# Altium PCB Camera_Board.PcbDoc
Units mm, origin at the board's own origin, x right, y up, seen from the top; angles counter-clockwise.
Board outline 85 x 80 mm, 4 copper layers (Top Layer, GND, DC Power, Bottom Layer), stack 1.782 mm thick; 98 components, 60 nets, 288 pads, 0 vias.
Unrouted connection lines stored in the file: 203.
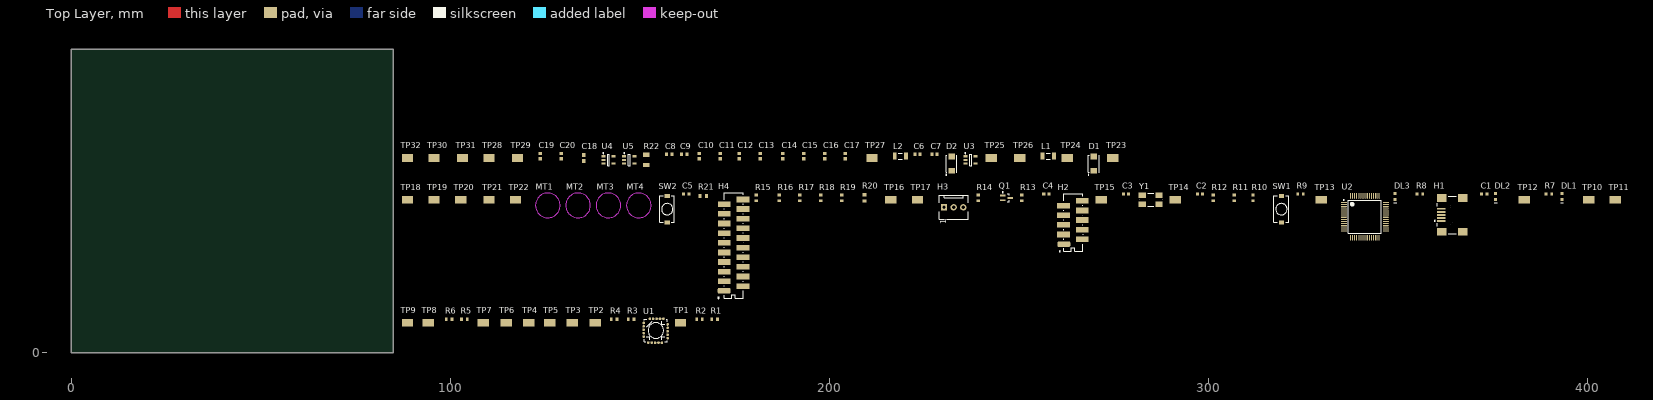
[diagram p0: Top Layer view]
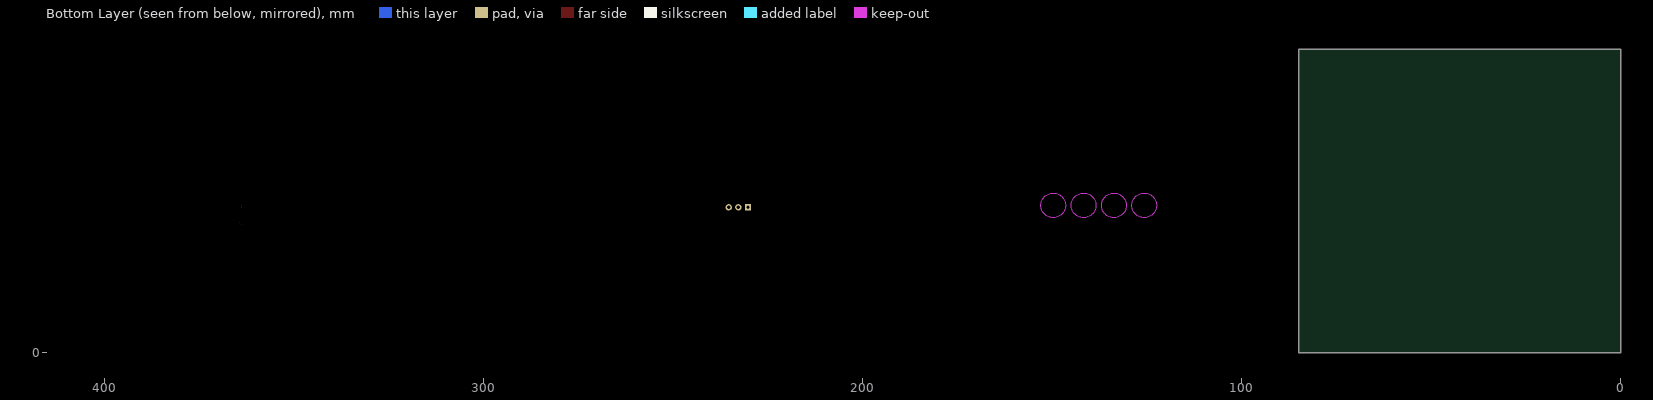
[diagram p1: Bottom Layer view, seen from below]
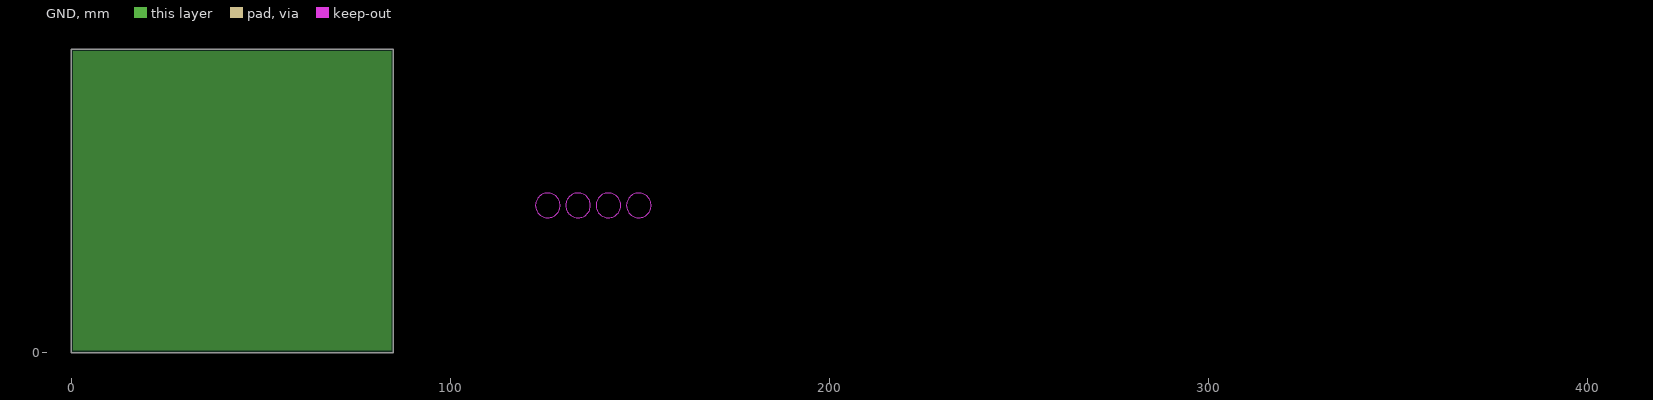
[diagram p2: GND, clearances drawn from the general rule]
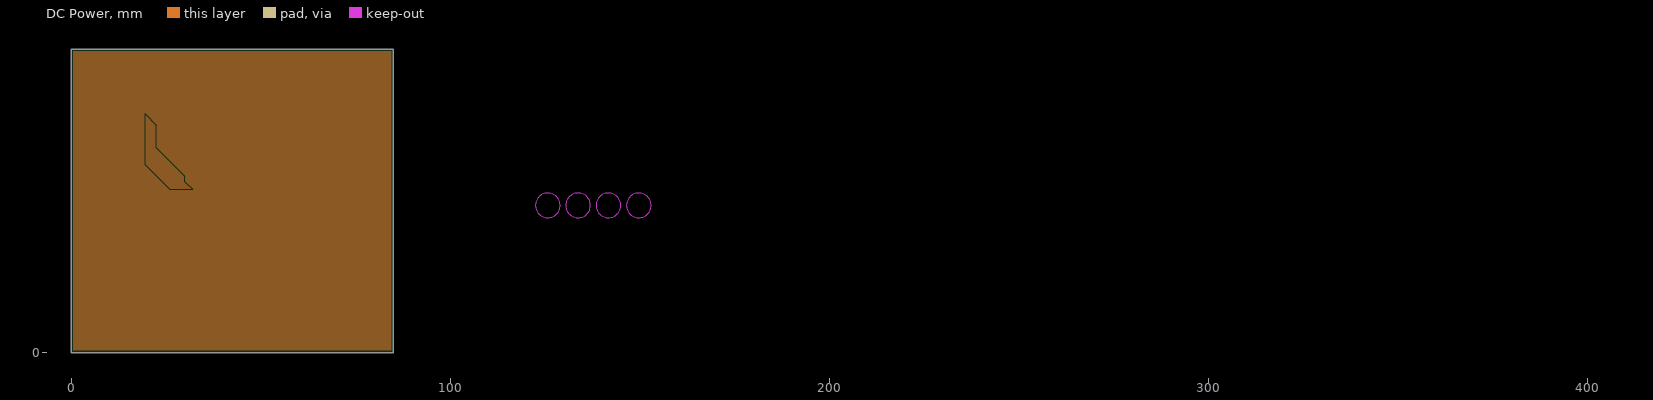
[diagram p3: DC Power, clearances drawn from the general rule]

## Layer stack, top to bottom
Top Solder: solder mask 0.0102, Solder Resist, Dk 3.5
Top Layer: signal copper 0.0356
Dielectric1: prepreg 0.32, FR-4, Dk 4.8
GND: plane copper 0.0356
Dielectric2: core 1, FR-4, Dk 4.8
DC Power: plane copper 0.0356
Dielectric3: prepreg 0.32, FR-4, Dk 4.8
Bottom Layer: signal copper 0.0356
Bottom Solder: solder mask 0.0102, Solder Resist, Dk 3.5

## Board outline
0,0 85,0 85,80 0,80

## Design rules (kind name [scope] priority, off if disabled: settings)
Clearance Min_Clearance_Circuit_Labs [All] p1: gap=0.15
DiffPairsRouting [All] p1: maxlimit=0.254 minlimit=0.254 mostfreqgap=0.254 toplayer_minwidth=0.381 toplayer_maxwidth=0.381 toplayer_prefwidth=0.381 bottomlayer_minwidth=0.381 bottomlayer_maxwidth=0.381 bottomlayer_prefwidth=0.381 maxuncoupledlength=12.7
FanoutControl Fanout_BGA [IsBGA] p1 off: bgadir=Out bgaviamode=Centered fanoutstyle=Auto fanoutdirection=Alternating viagrid=0.025 // Fanout_BGA (Default Rule)
HoleSize [All] p1: absolutevalues=TRUE maxlimit=10 minlimit=0.3 maxpercent=80.000 minpercent=20.000
MinimumAnnularRing [All] p1: minimumring=0.1
MinimumSolderMaskSliver [All] p1: minsoldermaskwidth=0.25
NetAntennae [All] p1: netantennaetolerance=1
PasteMaskExpansion [All] p1 off: expansion=0.2
PlaneClearance [All] p1: clearance=0.508
PlaneConnect [All] p1: planeconnectstyle=Relief reliefexpansion=0.508 reliefentries=4 reliefconductorwidth=0.254 reliefairgap=0.254
PolygonConnect [All] p1: connectstyle=Relief reliefconductorwidth=0.254 reliefentries=4 polygonreliefangle="90 Angle" airgapwidth=0.254
RoomDefinition Power_Distribution [InComponentClass('Power_Distribution')] p1: confinementstyle=ConfineIn formatcopy=TRUE lockcomponents=FALSE outline 86.2,46.3 279.199,46.3 279.199,55.8 86.2,55.8
RoomDefinition Camera_Board [InComponentClass('Camera_Board')] p2: confinementstyle=ConfineIn formatcopy=TRUE lockcomponents=FALSE outline 86.2,13.8 410.699,13.8 410.699,45.3 86.2,45.3
RoomDefinition Camera [InComponentClass('Camera')] p3: confinementstyle=ConfineIn formatcopy=TRUE lockcomponents=FALSE outline 86.2,1.8 171.2,1.8 171.2,12.3 86.2,12.3
RoutingVias [All] p1: holewidth=0.5 width=1 viastyle="Through Hole" minholewidth=0.3 minwidth=0.6 maxholewidth=1 maxwidth=2
SMDNeckDown [All] p1 off: percent=50.000
SMDToCorner [All] p1: distance=98425
SMDToPlane [All] p1: distance=1968504
SilkToSolderMaskClearance SilkscreenOverComponentPads [IsPad] p1: minsilkscreentomaskgap=0.254 clearancetoexposedcopper=TRUE
SolderMaskExpansion [All] p1: expansion=0.102
ViasUnderSMD [All] p1: allowed=FALSE
Width [All] p1: maxlimit=2 minlimit=0.15 preferedwidth=0.3
21 further rules are at their usual default settings.

## Classes and differential pairs
net class Y1_Nets: NetC2_2 NetC3_2
net class U5_Nets: +1V5 +5IN GND NetTP29_1
net class U4_Nets: +2V8 +5IN GND NetTP28_1
net class U3_Nets: +3V3 +5IN GND
net class U2_Nets: +3V3 ERASE GND LED1 LED2 LED3 NetC2_2 NetC3_2 NetC17_2 NetH3_2 NetR1_2 NetR3_2 NetR5_1 NetR5_2 NetR6_1 NetR10_1 NetR11_2 NetR12_2 NetR13_2 NetTP2_1 NetTP3_1 NetTP5_1 NetTP6_1 NetTP7_1 NetTP14_1 NetTP15_1 NetTP28_1 NetTP29_1 NetU1_11 NetU1_12 NetU1_13 NetU1_14 NetU1_17 NetU1_18 NetU2_5 NetU2_6 NetU2_13 NetU2_19 NetU2_21 NetU2_34 NetU2_59 NetU2_63 NRST PWR SCL SDA TCK TDI TDO TMS "USB DETECT" VDDOUT
net class U1_Nets: +1V5 +2V8 GND NetR1_1 NetR3_1 NetR5_1 NetR6_1 NetTP2_1 NetTP3_1 NetTP5_1 NetTP6_1 NetTP7_1 NetU1_11 NetU1_12 NetU1_13 NetU1_14 NetU1_17 NetU1_18
net class TP32_Nets: GND
net class TP31_Nets: GND
net class TP30_Nets: GND
net class TP29_Nets: NetTP29_1
net class TP28_Nets: NetTP28_1
net class TP27_Nets: GND
net class TP26_Nets: VDDOUT
net class TP25_Nets: +3V3
net class TP24_Nets: VBUS
net class TP23_Nets: +5V
net class TP22_Nets: TDI
net class TP21_Nets: TMS
net class TP20_Nets: TCK
net class TP19_Nets: TDO
net class TP18_Nets: NRST
net class TP17_Nets: SCL
net class TP16_Nets: SDA
net class TP15_Nets: NetTP15_1
net class TP14_Nets: NetTP14_1
net class TP13_Nets: USB_P
net class TP12_Nets: USB_N
net class TP11_Nets: ERASE
net class TP10_Nets: +3V3
net class TP9_Nets: NetR6_1
net class TP8_Nets: NetR5_1
net class TP7_Nets: NetTP7_1
net class TP6_Nets: NetTP6_1
net class TP5_Nets: NetTP5_1
net class TP4_Nets: NetR3_1
net class TP3_Nets: NetTP3_1
net class TP2_Nets: NetTP2_1
net class TP1_Nets: NetR1_1
net class SW2_Nets: GND NRST
net class SW1_Nets: GND NetR10_2
net class R22_Nets: NetC17_2 NetC18_2
net class R21_Nets: GND "USB DETECT"
net class R20_Nets: "USB DETECT" VBUS
net class R19_Nets: +3V3 TDI
net class R18_Nets: +3V3 TMS
net class R17_Nets: +3V3 TCK
net class R16_Nets: +3V3 TDO
net class R15_Nets: +3V3 NRST
net class R14_Nets: NetR13_2 SDA
net class R13_Nets: NetR13_2 SCL
net class R12_Nets: NetR12_2 USB_N
net class R11_Nets: NetR11_2 USB_P
net class R10_Nets: NetR10_1 NetR10_2
net class R9_Nets: GND NetDL3_1
net class R8_Nets: GND NetDL2_1
net class R7_Nets: GND NetDL1_1
net class R6_Nets: NetR5_2 NetR6_1
net class R5_Nets: NetR5_1 NetR5_2
net class R4_Nets: GND NetR3_1
net class R3_Nets: NetR3_1 NetR3_2
net class R2_Nets: GND NetR1_1
net class R1_Nets: NetR1_1 NetR1_2
net class Q1_Nets: +5IN NetH3_3 PWR
net class L2_Nets: NetC17_2 VDDOUT
net class L1_Nets: NetD2_2 VBUS
net class H4_Nets: +3V3 GND NetH4_3 NetH4_11 NetH4_17 NetH4_19 NRST TCK TDI TDO TMS
net class H3_Nets: GND NetH3_2 NetH3_3
net class H2_Nets: +5V GND NetH2_3 NetH2_4 NetH2_9 NetH2_10 SCL SDA
net class H1_Nets: GND NetH1_4 USB_N USB_P VBUS
net class DL3_Nets: LED3 NetDL3_1
net class DL2_Nets: LED2 NetDL2_1
net class DL1_Nets: LED1 NetDL1_1
net class D2_Nets: +5IN NetD2_2
net class D1_Nets: +5IN +5V
net class C20_Nets: +1V5 GND
net class C19_Nets: +2V8 GND
net class C18_Nets: GND NetC18_2
net class C17_Nets: GND NetC17_2
net class C16_Nets: GND VDDOUT
net class C15_Nets: GND VDDOUT
net class C14_Nets: GND VDDOUT
net class C13_Nets: GND VDDOUT
net class C12_Nets: +3V3 GND
net class C11_Nets: +3V3 GND
net class C10_Nets: +3V3 GND
net class C9_Nets: +3V3 GND
net class C8_Nets: +3V3 GND
net class C7_Nets: +3V3 GND
net class C6_Nets: +5IN GND
net class C5_Nets: +3V3 GND
net class C4_Nets: +5V GND
net class C3_Nets: GND NetC3_2
net class C2_Nets: GND NetC2_2
net class C1_Nets: GND VBUS
component class Power_Distribution: C6 C7 C8 C9 C10 C11 C12 C13 C14 C15 C16 C17 C18 C19 C20 D1 D2 L1 L2 R22 TP23 TP24 TP25 TP26 TP27 TP28 TP29 TP30 TP31 TP32 U3 U4 U5
component class Camera: R1 R2 R3 R4 R5 R6 TP1 TP2 TP3 TP4 TP5 TP6 TP7 TP8 TP9 U1
component class Camera_Board: C1 C2 C3 C4 C5 DL1 DL2 DL3 H1 H2 H3 H4 MT1 MT2 MT3 MT4 Q1 R7 R8 R9 R10 R11 R12 R13 R14 R15 R16 R17 R18 R19 R20 R21 SW1 SW2 TP10 TP11 TP12 TP13 TP14 TP15 TP16 TP17 TP18 TP19 TP20 TP21 TP22 U2 Y1
differential pair USB: +USB_P -USB_N

## Components (designator, comment, footprint, x,y, rotation, side; value= is the part's Value field where it differs from the comment)
C1 "100nF" CAPC1608L 372.699,41.8 r0 top
C2 "10pF" CAPC1608L 297.699,41.8 r0 top
C3 "10pF" CAPC1608L 278.199,41.8 r0 top
C4 "100nF" CAPC1608L 257.199,41.8 r0 top
C5 "100nF" CAPC1608L 162.2,41.8 r0 top
C6 "10uF" CAPC1608L 223.199,52.3 r0 top
C7 "10uF" CAPC1608L 227.699,52.3 r0 top
C8 "100nF" CAPC1608L 157.7,52.3 r0 top
C9 "100nF" CAPC1608L 161.7,52.3 r0 top
C10 "100nF" CAPC1608L 165.7,51.8 r90 top
C11 "100nF" CAPC1608L 171.2,51.8 r90 top
C12 "100nF" CAPC1608L 176.2,51.8 r90 top
C13 "100nF" CAPC1608L 181.7,51.8 r90 top
C14 "100nF" CAPC1608L 187.7,51.8 r90 top
C15 "100nF" CAPC1608L 193.2,51.8 r90 top
C16 "100nF" CAPC1608L 198.7,51.8 r90 top
C17 "100nF" CAPC1608L 204.199,51.8 r90 top
C18 "4.7uF" CAPC1608N 135.2,51.3 r90 top
C19 "10uF" CAPC1608L 123.7,51.8 r90 top
C20 "10uF" CAPC1608L 129.2,51.8 r90 top
D1 "DR_ES1A" SMA 269.699,49.8 r90 top
D2 "DR_ES1A" SMA 232.199,49.8 r90 top
DL1 "Dark Green" WL-SMCW0603 393.199,40.3 r90 top
DL2 "Yellow" WL-SMCW0603 375.699,40.3 r90 top
DL3 "Red" WL-SMCW0603 349.199,40.3 r90 top
H1 "JS_USB_MINI_B" USB/SM0.8-6H5 369.199,36.3 r0 top
H2 "I2C" 188275-10 264.199,34.3 r90 top
H3 "3 Pin Molex KK Hdr" MOLEX_KK_3_HDR 230.199,38.3 r0 top
H4 "ARM JTAG" 188275-20 174.7,28.3 r90 top
L1 "Ferrite Bead" INDC3216L 257.699,51.8 r0 top
L2 "Ferrite Bead" INDC3216L 218.699,51.8 r0 top
MT1 "M3.2 NPTH" MNT-HOLE_3.2mm_NPTH 125.7,38.8 r0 top
MT2 "M3.2 NPTH" MNT-HOLE_3.2mm_NPTH 133.7,38.8 r0 top
MT3 "M3.2 NPTH" MNT-HOLE_3.2mm_NPTH 141.7,38.8 r0 top
MT4 "M3.2 NPTH" MNT-HOLE_3.2mm_NPTH 149.7,38.8 r0 top
Q1 "BC817W" SOT323_M 246.699,40.8 r0 top
R1 "10R" RESC1608L 169.7,8.8 r0 top
R2 "50R" RESC1608L 165.7,8.8 r0 top
R3 "10R" RESC1608L 147.7,8.8 r0 top
R4 "50R" RESC1608L 143.2,8.8 r0 top
R5 "2K2" RESC1608L 103.7,8.8 r0 top
R6 "2K2" RESC1608L 99.7,8.8 r0 top
R7 "62R" RESC1608L 389.699,41.8 r0 top
R8 "220R" RESC1608L 355.699,41.8 r0 top
R9 "220R" RESC1608L 324.199,41.8 r0 top
R10 "2K2" RESC1608L 311.699,40.8 r90 top
R11 "27R" RESC1608L 306.699,40.8 r90 top
R12 "27R" RESC1608L 301.199,40.8 r90 top
R13 "2K2" RESC1608L 250.699,40.8 r90 top
R14 "2K2" RESC1608L 239.199,40.8 r90 top
R15 "100K" RESC1608L 180.7,40.8 r90 top
R16 "100K" RESC1608L 186.7,40.8 r90 top
R17 "100K" RESC1608L 192.2,40.8 r90 top
R18 "100K" RESC1608L 197.7,40.8 r90 top
R19 "100K" RESC1608L 203.199,40.8 r90 top
R20 "27K" RESC1608N 209.199,40.8 r90 top
R21 "47K" RESC1608N 166.7,41.3 r0 top
R22 "1R" RESC3216L 151.7,50.8 r90 top
SW1 "Sleep/Wake Up" KSR211G 319.199,34.3 r90 top
SW2 "Reset" KSR211G 157.2,34.3 r90 top
TP1 "PA11" TP_0805 160.7,7.8 r0 top
TP2 "PA11" TP_0805 138.2,7.8 r0 top
TP3 "PA11" TP_0805 132.2,7.8 r0 top
TP4 "PA11" TP_0805 120.7,7.8 r0 top
TP5 "PA11" TP_0805 126.2,7.8 r0 top
TP6 "PA11" TP_0805 114.7,7.8 r0 top
TP7 "PA11" TP_0805 108.7,7.8 r0 top
TP8 "PA11" TP_0805 94.2,7.8 r0 top
TP9 "PA11" TP_0805 88.7,7.8 r0 top
TP10 "3V3" TP_0805 400.199,40.3 r0 top
TP11 "Erase" TP_0805 407.199,40.3 r0 top
TP12 "USB_N" TP_0805 383.199,40.3 r0 top
TP13 "USB_P" TP_0805 329.699,40.3 r0 top
TP14 "PA15" TP_0805 291.199,40.3 r0 top
TP15 "PA11" TP_0805 271.699,40.3 r0 top
TP16 "PA11" TP_0805 216.199,40.3 r0 top
TP17 "PA11" TP_0805 223.199,40.3 r0 top
TP18 "nRST" TP_0805 88.7,40.3 r0 top
TP19 "TDO" TP_0805 95.7,40.3 r0 top
TP20 "TCK" TP_0805 102.7,40.3 r0 top
TP21 "TMS" TP_0805 110.2,40.3 r0 top
TP22 "TDI" TP_0805 117.2,40.3 r0 top
TP23 "V_Bus" TP_0805 274.699,51.3 r0 top
TP24 "V_Bus" TP_0805 262.699,51.3 r0 top
TP25 "3V3" TP_0805 242.699,51.3 r0 top
TP26 "VddOut" TP_0805 250.199,51.3 r0 top
TP27 "Gnd" TP_0805 211.199,51.3 r0 top
TP28 "Gnd" TP_0805 110.2,51.3 r0 top
TP29 "Gnd" TP_0805 117.7,51.3 r0 top
TP30 "Gnd" TP_0805 95.7,51.3 r0 top
TP31 "Gnd" TP_0805 103.2,51.3 r0 top
TP32 "Gnd" TP_0805 88.7,51.3 r0 top
U1 "TCM8230MD" TCM8230MD 151.2,8.8 r0 top
U2 "ATSAM4S8BA-ANR" LQFP64_L 341.199,35.8 r0 top
U3 "TLV70233DBVR" SOT95P280X145-5N 237.199,50.8 r0 top
U4 "TPS78228DDCR" SOT95P280X145-5N 141.7,50.8 r0 top
U5 "TPS73115DBVR" SOT95P280X145-5N 147.2,50.8 r0 top
Y1 "12 MHz" 6.0X3.5-4 284.699,40.3 r0 top

## Footprints (in the part's own frame and the unit in brackets; to place one, negate y for a bottom-side part, rotate by r counter-clockwise, add the part's x,y. Pads: shape width x height; smd on the part's side, far side on the other; paste and mask are expansions set on the pad)
6.0X3.5-4 [mm] "4 SMD 6.0X3.5 mm No Lead Crystal"
  rect 1.9x1.4 smd: 1(-2.2,-1.2) 2(2.2,-1.2) 3(2.2,1.2) 4(-2.2,1.2)
  silkscreen extent -3,-1.75 3,1.75, body extent -3,-1.75 3,1.75, height 1.2
188275-10 [mm] "MicroMatch Ribbon Connector 10 way"
  rrect50% 1.5x3.4 smd: 1(-5.724,2.385)
  rect 1.5x3.4 smd: 2(-4.445,-2.461) 3(-3.175,2.461) 4(-1.905,-2.461) 5(-0.635,2.461) 6(0.635,-2.461) 7(1.905,2.461) 8(3.175,-2.461) 9(4.445,2.461) 10(5.715,-2.461)
  silkscreen extent -7.74,-2.55 7.62,3.57, body extent -7.62,-2.5 7.64,2.43, height 8.45
188275-20 [mm] "MicroMatch Ribbon Connector 20 way"
  rrect50% 1.5x3.4 smd: 1(-12,2.5)
  rect 1.5x3.4 smd: 2(-10.795,-2.461) 3(-9.525,2.461) 4(-8.255,-2.461) 5(-6.985,2.461) 6(-5.715,-2.461) 7(-4.445,2.461) 8(-3.175,-2.461) 9(-1.905,2.461) 10(-0.635,-2.461) 11(0.635,2.461) 12(1.905,-2.461) 13(3.175,2.461) 14(4.445,-2.461) 15(5.715,2.461) 16(6.985,-2.461) 17(8.255,2.461) 18(9.525,-2.461) 19(10.795,2.461) 20(12.065,-2.461)
  silkscreen extent -14.06,-2.54 13.83,4.16, body extent -13.96,-2.54 13.93,2.46, height 8.45
CAPC1608L [mm] "Chip Capacitor, Body 1.6x0.8mm, IPC High Density"
  rect 0.8x0.9 smd: 1(-0.7,0) 2(0.7,0)
  body extent -0.87,-0.48 0.87,0.48, height 0.85
CAPC1608N [mm] "Chip Capacitor, Body 1.6x0.8mm, IPC Medium Density"
  rect 1x1 smd: 1(-0.8,0) 2(0.8,0)
  body extent -0.87,-0.48 0.87,0.48, height 0.85
INDC3216L [mm] "Chip Inductor, Body 3.2x1.6mm, IPC High Density"
  rect 1x1.8 smd: 1(-1.5,0) 2(1.5,0)
  silkscreen extent -0.55,-0.8 0.55,0.8, body extent -1.75,-0.95 1.75,0.95, height 1.9
KSR211G [mm] "Subminature Tactile Switch in SMT"
  rect 1x1.4 smd: 1(0,0) 2(7,0)
  silkscreen extent 0,-1.9 7,2, body extent 0,-1.9 7,2, height 4.25
LQFP64_L [mm] "Thin QFP, 64-Leads, Body 10x10mm, Pitch 0.5mm, IPC High Density"
  oval 1.55x0.25 smd mask+0.07: 1(-5.525,3.75) 2(-5.525,3.25) 3(-5.525,2.75) 4(-5.525,2.25) 5(-5.525,1.75) 6(-5.525,1.25) 7(-5.525,0.75) 8(-5.525,0.25) 9(-5.525,-0.25) 10(-5.525,-0.75) 11(-5.525,-1.25) 12(-5.525,-1.75) 13(-5.525,-2.25) 14(-5.525,-2.75) 15(-5.525,-3.25) 16(-5.525,-3.75) 33(5.525,-3.75) 34(5.525,-3.25) 35(5.525,-2.75) 36(5.525,-2.25) 37(5.525,-1.75) 38(5.525,-1.25) 39(5.525,-0.75) 40(5.525,-0.25) 41(5.525,0.25) 42(5.525,0.75) 43(5.525,1.25) 44(5.525,1.75) 45(5.525,2.25) 46(5.525,2.75) 47(5.525,3.25) 48(5.525,3.75)
  oval 0.25x1.55 smd mask+0.07: 17(-3.75,-5.525) 18(-3.25,-5.525) 19(-2.75,-5.525) 20(-2.25,-5.525) 21(-1.75,-5.525) 22(-1.25,-5.525) 23(-0.75,-5.525) 24(-0.25,-5.525) 25(0.25,-5.525) 26(0.75,-5.525) 27(1.25,-5.525) 28(1.75,-5.525) 29(2.25,-5.525) 30(2.75,-5.525) 31(3.25,-5.525) 32(3.75,-5.525) 49(3.75,5.525) 50(3.25,5.525) 51(2.75,5.525) 52(2.25,5.525) 53(1.75,5.525) 54(1.25,5.525) 55(0.75,5.525) 56(0.25,5.525) 57(-0.25,5.525) 58(-0.75,5.525) 59(-1.25,5.525) 60(-1.75,5.525) 61(-2.25,5.525) 62(-2.75,5.525) 63(-3.25,5.525) 64(-3.75,5.525)
  silkscreen extent -5.65,-4.35 4.35,4.55, body extent -5,-5 5,5, height 1.6
MNT-HOLE_3.2mm_NPTH [mm] "Mounting Hole 3.2mm non plated"
  round 0 hole 3.2 unplated: 1(0,0)
  Keep-Out Layer circle w0.254: c0,0 r3.25
MOLEX_KK_3_HDR [mil] "MOLEX_KK_3_HDR"
  rect 65x65 hole 35.43: 1(0,0)
  round 65 hole 35.43: 2(100,0) 3(200,0)
  silkscreen extent -50,-125 250,125, body extent -44,-120 244,119, height 630
RESC1608L [mm] "Chip Resistor, Body 1.6x0.8mm, IPC High Density"
  rect 0.7x0.9 smd: 1(-0.75,0) 2(0.75,0)
  body extent -0.85,-0.48 0.85,0.48, height 0.9
RESC1608N [mm] "Chip Resistor, Body 1.6x0.8mm, IPC Medium Density"
  rect 0.9x1 smd: 1(-0.85,0) 2(0.85,0)
  body extent -0.85,-0.48 0.85,0.48, height 0.6
RESC3216L [mm] "Chip Resistor, Body 3.1x1.6mm, IPC High Density"
  rect 1.1x1.7 smd: 1(-1.35,0) 2(1.35,0)
  body extent -1.68,-0.87 1.68,0.87, height 2.54
SMA [mm] "SODFL, 2-Leads, Body 2.67x5.10mm, IPC Medium Density"
  rect 1.52x1.7 smd: 1(-1.88,0) 2(1.88,0)
  silkscreen extent -3.02,-1.4 2.25,1.52, body extent -2.25,-1.4 2.25,1.4, height 2.29
SOT95P280X145-5N [mm] "SOT23, 5-Leads, Body 2.90x2.80mm, Pitch 0.95mm, IPC Medium Density"
  rect 1.05x0.6 smd: 1(-1.35,0.95) 2(-1.35,0) 3(-1.35,-0.95) 4(1.35,-0.95) 5(1.35,0.95)
  silkscreen extent -1.47,-1.55 0.25,1.92, body extent -0.87,-1.52 0.87,1.53, height 1.45
SOT323_M [mm] "SOT323, 3-Leads, Body 2.0x1.3mm, Pitch 0.65mm, Lead Span 2.1mm, IPC Low Density"
  rect 1.5x0.5 smd: 1(-1,0.65) 2(-1,-0.65) 3(1,0)
  silkscreen extent -1.12,-1.1 0.7,1.57, body extent -0.7,-1.1 0.7,1.1, height 1.1
TCM8230MD [mm] "Toshiba VGA Camera Module"
  round 0.7 smd mask+0.04: 1(-0.2,-1) 2(-0.2,-1.9) 3(-0.2,-2.8) 4(-0.2,-3.7) 5(-0.2,-4.6) 6(1,-6.2) 7(1.9,-6.2) 8(2.8,-6.2) 9(3.7,-6.2) 10(4.6,-6.2) 11(6.1,-5) 12(6.1,-4.1) 13(6.1,-3.2) 14(6.1,-2.3) 15(6.1,-1.4) 16(5,0.1) 17(4.1,0.1) 18(3.2,0.1) 19(2.3,0.1) 20(1.4,0.1)
  silkscreen extent 0,-6 6,0, body extent 0,-6 6,0, height 4.5
TP_0805 [mm] "TestPoint SMD"
  rect 3x2 smd: 1(0,0)
  body extent -1.5,-1 1.5,1.1, height 1.4
USB/SM0.8-6H5 [mm] "Connector; USB2.0, Type B, SM; 5 Position; Right Angle"
  rect 2.3x0.5 smd mask+0.07: 1(-7.85,-1.6) 2(-7.85,-0.8) 3(-7.85,0) 4(-7.85,0.8) 5(-7.85,1.6)
  rect 2.5x2 smd: 6(-7.75,4.45) 7(-2.25,4.45) 8(-7.75,-4.45) 9(-2.25,-4.45)
  round 0.6 hole 0.9 unplated: MH1(-5.25,2.2) MH2(-5.25,-2.2)
  silkscreen extent -9.67,-4.95 -3.95,4.95, body extent -8.9,-4.95 0.7,4.95, height 3.9
WL-SMCW0603 [mm] "2.4 x 0.8 x 0.7mm LED"
  rect 0.8x0.8 smd: 1(0,0) 2(1.6,0)
  silkscreen extent -0.85,-0.35 -0.85,0.35

## Part data
C1 C4 C5 C8 C9 C10 C11 C12 C13 C14 C15 C16 C17: library part CC_100nF_0603, "CAP CER 100nF X7R +-10% 50V 0603"
C2 C3: library part CC_10pF_0603, "CAP CER 10pF COG/NPO 50V 0603"
C6 C7 C19 C20: library part CC_10uF_0603, "CAP CER 10UF X5R +-20% 10V 0603"
C18: library part CC_4.7uF_0603, "CAP CER 4.7uF X5R +-20%  10V 0603"
D1 D2: "Ultrafast Rectifier SMD, SMA (DO-214C)"
DL1: library part DL_150060GS75000, "LED Dk Green 430mcd 0603 SMD"
DL2: library part DL_150060YS75000, "LED Yellow 120mcd 0603 SMD"
DL3: library part DL_150060RS75000, "LED Red 250mcd 0603 SMD"
H1: library part JS_USB_MINI_B_SMT, "USB 2.0, Right Angle, SMT, B Type, Receptacle, 5 Position,"
H2: library part JB_HDR_IDC_5X2_VERT, "IDC Header, 1,27mm, 10-Pin, Vert, SMT"
H3: library part JA_MOLEX_KK_3POS, "CONN HEADER 3POS 2.54mm VERT_Thru Hole"
H4: library part JB_HDR_IDC_10X2_VERT, "IDC Header, 1,27mm, 20-Pin, Vert, SMT"
L1 L2: library part IN_Ferrite-Bead, "Ferrite Bead, Rdc 0.3R, Z100MHZ 600R, Imax 1A, SMD 1206"
MT1 MT2 MT3 MT4: library part MC_M3.2_HOLE, "Fixing M3.2 Mount Hole NPTH"
Q1: library part TB_BC817W, "NPN GP Bipolar Transistor 45V 500mA SOT323"
R1 R2 R3 R4 R5 R6 R10 R13 R14: library part RS_2K2, "RES 2.2K OHM 1/10W 5% 0603 SMD"
R7: library part RS_62R, "RES 62 OHM 1/10W 5% 0603 SMD"
R8 R9: library part RS_220R, "RES 220 OHM 1/10W 5% 0603 SMD"
R11 R12: library part RS_27R, "RES 27 OHM 1/10W 5% 0603 SMD"
R15 R16 R17 R18 R19: library part RS_100K, "RES 100K OHM 1/10W 5% 0603 SMD"
R20: library part RS_27K, "RES 27K OHM 1/10W 5% 0603 SMD"
R21: library part RS_47K, "RES 47.0K OHM 1/10W 5% 0603 SMD"
R22: library part RT_1R, "RES 1R OHM 1/4W 5% 1206 SMD"
SW1 SW2: library part "WS_KSR211G LFS", "SWITCH TACTILE SPST-NO SMD"
TP1 TP2 TP3 TP4 TP5 TP6 TP7 TP8 TP9 TP10 TP11 TP12 TP13 TP14 TP15 TP16 TP17 TP18 TP19 TP20 TP21 TP22 TP23 TP24 TP25 TP26 TP27 TP28 TP29 TP30 TP31 TP32: library part TP_0805, "Test Point 2.0X0.9X1.2mm SMD"
U1: "Toshiba I2C Camera"
U2: library part SE_ATSAM4S16BA-MU, "IC MCU 32BIT 512KB FLASH 64LQFP"
U3: library part SV_TLV70233DBVR, "IC REG LDO 3.3V 0.3A SOT23-5"
U4: library part SV_TLV70233DBVR, "IC REG LDO 2.8V 0.3A SOT23-5"
U5: library part SV_TLV70233DBVR, "IC REG LDO 1.5V 0.3A SOT23-5"
Y1: library part XT_CRYSTAL_18.432MHz_13pF, "18.432 MHZ 4PF  6.0X3.5mm SMD"

## Nets (pads, with @x,y where several pads share a name; then routed paths per layer and width w, separated by ;. In a path a pad name is that pad's centre, name@x,y a point inside that pad or via, vN(x,y) a via of type N, cw(c..) or ccw(c..) an arc to the next point about the centre after c; other vN are vias at no path point)
+1V5: C20.1 U1.6 U5.5
+2V8: C19.1 U1.1 U1.16 U4.5
+3V3: C5.2 C7.1 C8.2 C9.2 C10.2 C11.2 C12.2 H4.1 H4.2 R15.2 R16.2 R17.2 R18.2 R19.2 TP10.1 TP25.1 U2.1 U2.7 U2.18 U2.45 U2.58 U3.5
+5IN: C6.1 D1.1 D2.1 Q1.3 U3.1 U3.3 U4.1 U5.1
+5V: C4.2 D1.2 H2.1 TP23.1
ERASE: TP11.1 U2.55
GND: C1.2 C2.1 C3.1 C4.1 C5.1 C6.2 C7.2 C8.1 C9.1 C10.1 C11.1 C12.1 C13.1 C14.1 C15.1 C16.1 C17.1 C18.1 C19.2 C20.2 H1.5 H1.6 H1.7 H1.8 H1.9 H2.2 H2.6 H2.8 H3.1 H4.4 H4.6 H4.8 H4.10 H4.12 H4.14 H4.16 H4.18 H4.20 R2.1 R4.1 R7.2 R8.2 R9.2 R21.1 SW1.2 SW2.2 TP27.1 TP30.1 TP31.1 TP32.1 U1.7 U1.15 U2.2 U2.17 U2.40 U2.46 U2.50 U2.60 U3.2 U3.4 U4.2 U4.4 U5.2 U5.4
LED1: DL1.2 U2.48
LED2: DL2.2 U2.47
LED3: DL3.2 U2.44
NetC2_2: C2.2 U2.62 Y1.3
NetC3_2: C3.2 U2.61 Y1.1
NetC17_2: C17.2 L2.1 R22.2 U2.64
NetC18_2: C18.2 R22.1
NetD2_2: D2.2 L1.2
NetDL1_1: DL1.1 R7.1
NetDL2_1: DL2.1 R8.1
NetDL3_1: DL3.1 R9.1
NetH3_2: H3.2 U2.3
NetH3_3: H3.3 Q1.2
NetR1_1: R1.1 R2.2 TP1.1 U1.2
NetR1_2: R1.2 U2.27
NetR3_1: R3.1 R4.2 TP4.1 U1.3
NetR3_2: R3.2 U2.52
NetR5_1: R5.1 TP8.1 U1.4 U2.30
NetR5_2: R5.2 R6.2 U2.32
NetR6_1: R6.1 TP9.1 U1.5 U2.29
NetR10_1: R10.1 U2.16
NetR10_2: R10.2 SW1.1
NetR11_2: R11.2 U2.57
NetR12_2: R12.2 U2.56
NetR13_2: R13.2 R14.2 U2.31
NetTP2_1: TP2.1 U1.19 U2.37
NetTP3_1: TP3.1 U1.20 U2.38
NetTP5_1: TP5.1 U1.8 U2.41
NetTP6_1: TP6.1 U1.9 U2.42
NetTP7_1: TP7.1 U1.10 U2.22
NetTP14_1: TP14.1 U2.20
NetTP15_1: TP15.1 U2.28
NetTP28_1: TP28.1 U2.10 U4.3
NetTP29_1: TP29.1 U2.9 U5.3
NetU1_11: U1.11 U2.11
NetU1_12: U1.12 U2.14
NetU1_13: U1.13 U2.15
NetU1_14: U1.14 U2.23
NetU1_17: U1.17 U2.25
NetU1_18: U1.18 U2.26
NRST: H4.15 R15.1 SW2.1 TP18.1 U2.39
PWR: Q1.1 U2.4
SCL: H2.5 R13.1 TP17.1 U2.36
SDA: H2.7 R14.1 TP16.1 U2.43
TCK: H4.9 R17.1 TP20.1 U2.53
TDI: H4.5 R19.1 TP22.1 U2.33
TDO: H4.13 R16.1 TP19.1 U2.49
TMS: H4.7 R18.1 TP21.1 U2.51
"USB DETECT": R20.1 R21.2 U2.35
USB_N: H1.2 R12.1 TP12.1
USB_P: H1.3 R11.1 TP13.1
VBUS: C1.1 H1.1 L1.1 R20.2 TP24.1
VDDOUT: C13.2 C14.2 C15.2 C16.2 L2.2 TP26.1 U2.8 U2.12 U2.24 U2.54
pads on no net: H1.4 H1.MH1 H1.MH2 H2.3 H2.4 H2.9 H2.10 H4.3 H4.11 H4.17 H4.19 MT1.1 MT2.1 MT3.1 MT4.1 U2.5 U2.6 U2.13 U2.19 U2.21 U2.34 U2.59 U2.63 Y1.2 Y1.4

## Polygon pours and split planes (outlines as drawn)
no net on GND (split plane): 84.49,0.51 0.51,0.51 0.51,79.49 84.49,79.49
+5V on DC Power (split plane): 22.371,59.946 22.371,54 22.38,53.95 22.408,53.908 29.871,46.446 29.871,45 29.88,44.95 29.908,44.908 31.687,43.129 26.054,43.129 19.629,49.554 19.629,62.687
no net on DC Power (split plane): 84.49,0.51 0.51,0.51 0.51,79.49 84.49,79.49

## Other copper
DC Power (plane layer: these items are gaps in the copper):
  lines w0.254: 19.5,49.5 26,43 32,43 30,45 30,46.5 22.5,54 22.5,60 19.5,63 19.5,49.5

## Silkscreen, mask and mechanical layers (free items; w line width, h text height)
Drill Drawing:
  text ".LEGEND" at 90,-19 h1.52
  text "Drill Drawing." at 89.5,-23 h1.52

## Dimensions
0,0 to 0,80 on Dimension
0,0 to 85,0 on Dimension

## Text inside footprints (layer, text, board x,y; h text height)
H1: Dimension "PCB Edge" at 369.631,32.263 h0.25 r90
H3: Top Overlay "1" at 230.834,33.855 h1.52 r90